# Altium PCB PCB1.PcbDoc (part 2 of 3)
Units mil, origin at the board's own origin, x right, y up, seen from the top; angles counter-clockwise.
Board outline 8343 x 1831 mil, 4 copper layers (Top Layer, VCC, GND, Bottom Layer); 375 components, 241 nets, 1575 pads, 601 vias.
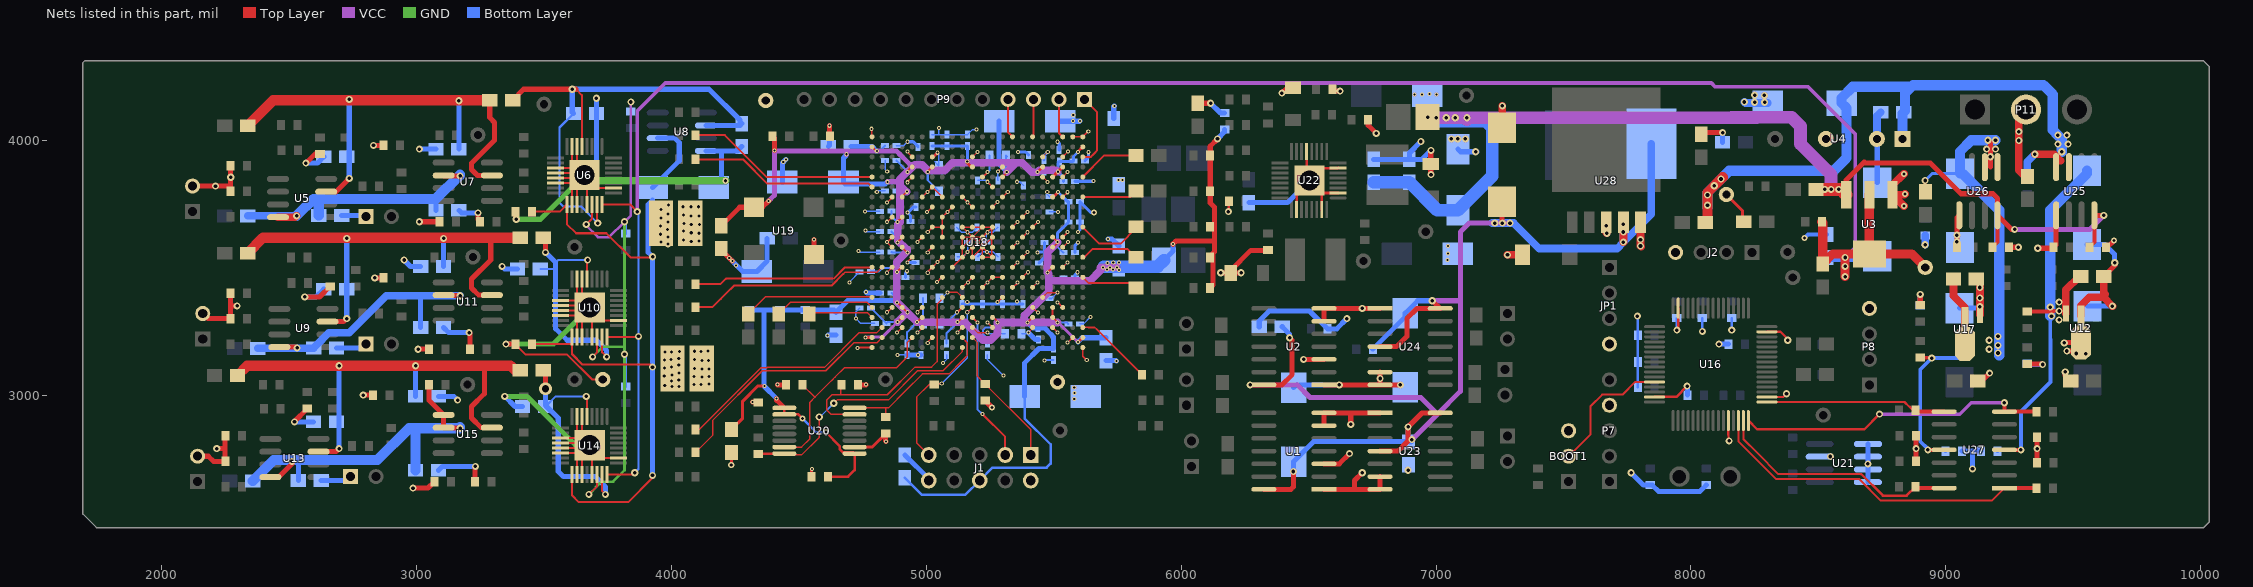
[diagram p4: the nets of this part, all layers, seen from the top]

## Via types
v1: diameter 28, hole 14, Top Layer to Bottom Layer, 286 vias
v2: diameter 16, hole 8, Top Layer to Bottom Layer, 238 vias
v3: diameter 24, hole 12, Top Layer to Bottom Layer, 70 vias
v4: diameter 196.85, hole 118.11, Top Layer to Bottom Layer, 6 vias
v5: diameter 50, hole 28, Top Layer to Bottom Layer, 1 vias

## Nets (pads, with @x,y where several pads share a name; then routed paths per layer and width w, separated by ;. In a path a pad name is that pad's centre, name@x,y a point inside that pad or via, vN(x,y) a via of type N, cw(c..) or ccw(c..) an arc to the next point about the centre after c; other vN are vias at no path point) (continued)
+3.3V: C39.2 C40.2 C54.2 C55.2 C56.2 C57.2 C60.2 C61.2 C62.2 C63.2 C64.2 C65.2 C66.2 C67.2 C68.2 C69.2 C70.2 C71.2 C72.2 C73.2 C74.2 C118.1 C119.1 C120.2 C121.2 C122.2 C123.2 C124.2 C125.2 C126.2 C127.2 C128.2 C129.2 C130.2 C131.2 C132.2 C133.2 C134.2 C135.1 J1.6 J5.2 R81.1 R82.1 R83.2 R84.2 R88.2 R129.2 R130.2 R131.2 R132.2 R133.2 R134.2 R135.2 R136.2 U18.A2 U18.A21 U18.AB2 U18.AB21 U18.D4 U18.D5 U18.D9 U18.D11 U18.D12 U18.D14 U18.D16 U18.E19 U18.F4 U18.G19 U18.K4 U18.L19 U18.N4 U18.P18 U18.U4 U18.V19 U18.W4 U18.W5 U18.W9 U18.W11 U18.W12 U18.W16 U18.W18 U18.Y19 U19.4 U20.1 U20.2 U20.9 | length 12538.7
  Top Layer w8: U18.A21@4786.61,3974.02 4803.63,3957 v2(4805,3957) ; v2(4884,3483) 4902.57,3501.57 U18.D9@4904.72,3501.57 ; v2(4885,3364) 4885,3363 4886,3362 4886.82,3362 U18.D5@4904.72,3344.09 4923.82,3325 v2(4925,3325) ; v2(4886,3287) 4887,3287 U18.D4@4904.72,3304.72 ; v2(4886,3599) 4904.72,3617.72 U18.D12@4904.72,3619.69 ; v2(4886,3679) 4886,3679.7 U18.D14@4904.72,3698.43 ; U18.D11@4904.72,3580.32 4904.72,3578.28 4925,3558 v2(4925,3559) ; U18.D16@4904.72,3777.17 4904.72,3779.72 v2(4923,3798) ; v2(4926,3876) 4926,3877 4924,3879 4940.28,3895.28 U18.E19@4944.09,3895.28 ; v2(4963,3286) 4981.72,3304.72 U18.F4@4983.46,3304.72 ; v2(5005,3875) 5005,3877.44 U18.G19@5022.83,3895.28 ; v2(5122,3286) 5122.22,3286 U18.K4@5140.94,3304.72 ; U18.N4@5259.06,3304.72 5261.28,3304.72 5279,3287 v2(5279,3285) ; U18.P18@5298.43,3855.91 5315,3872.48 v2(5315,3875) ; v2(5397,3285) 5397,3285.19 U18.U4@5416.54,3304.72 ; v2(5475,3481) 5475,3481.3 U18.W9@5495.28,3501.57 ; U18.W5@5495.28,3344.09 U18.W4@5495.28,3304.72 5515,3285 v2(5515,3284) ; U18.W11@5495.28,3580.32 5497.32,3580.32 5515,3598 v2(5515,3600) ; U18.W12@5495.28,3619.69 v2(5515,3600)
  Top Layer w10: U20.1@4442.2,2949.57 U20.2@4442.2,2923.98 4497.02,2923.98 v3(4513,2908) ; v3(4605,2854) 4659.55,2799.45 4659.55,2787.8 4671.18,2776.17 4712.06,2776.17 U20.9@4717.8,2770.43 4717.8,2705.8 4692,2680 C40.2@4613.46,2680
  Top Layer w12: C126.2@4235.06,2864.92 4278.81,2908.68 4278.81,2976.19 4338.63,3036 v2(4364,3036) ; v2(4761,3226) U18.A2@4786.61,3225.98 ; v2(5160,3916) 5160,3911 5175.72,3895.28 U18.L19@5180.31,3895.28 ; v2(5436,3875) 5436,3875.37 U18.V19@5455.91,3895.28 ; U18.W16@5495.28,3780.72 U18.W16@5495.28,3777.17 5497.17,3777.17 5516,3796 v2(5516,3797) ; U18.W18@5495.28,3855.91 v2(5515.69,3876.32) U18.Y19@5534.65,3895.28 ; v2(5594,3208) 5595.4,3208 U18.AB2@5613.39,3225.98 ; v2(5595,3954) 5595,3955.63 U18.AB21@5613.39,3974.02
  Top Layer w20: C54.2@4195.06,3664.92 4267.03,3736.9 U19.4@4322.37,3736.9 4355.9,3736.9 v2(4381,3762) ; R136.2@4396.54,4015 4403,4008.54 v2(4403,3959) ; v2(4412,2986) 4412,2979.77 U20.1@4442.2,2949.57 ; v2(5968,3592) 5968,3594 5979,3605 6130,3605 ; R88.2@6113.46,3420 6125,3431.54 6125,3557.43 6130,3562.43 6130,3575 6130,3591 6130,3605 ; v1(6142,4005) 6113.46,3976.46 R135.2@6113.46,3940 6113.46,3753.96 6130,3737.43 6130,3605
  VCC w8: v2(4805,3957) 4848,3957 4883,3957
  VCC w12: v2(4761,3226) 4762,3227 4826,3227 v2(4886,3287) ; v2(5515,3284) 5518,3284 v2(5594,3208)
  VCC w20: v2(4381,3762) 4403,3784 v2(4403,3959) 4405,3957 v2(4805,3957) 4883,3957 4895,3945 4936,3904 4953.99,3904 ; v2(4686,3945) 4686,3957 ; v2(4847,3837) 4881.99,3837 4896,3822.99
  VCC w30: v2(4886,3287) 4887,3287 v2(4925,3325) ; v2(4923,3798) 4920.99,3798 4896,3822.99 ; v2@5005,3881 v2@5006,3881 ; v2(5315,3875) 5352,3912 ; v2(5436,3875) 5413,3875 5376,3912 5352,3912 ; v2@5436.38,3875.38 5443,3882 5510,3882 v2(5515.69,3876.32) ; v2(5515,3284) 5514,3285 v2(5397,3285) 5384,3285 ; v2(5515,3600) 5475,3560 v2(5475,3481) 5480,3476 5480,3448 ; v2(5747,3501) 5732,3501 v2(5720,3501) v2(5693,3501) 5685,3501 5683,3499 5683,3490 5642,3449 5481,3449 5480,3448 ; 4896,3822.99 4896,3847.01 4924.99,3876 v2(4926,3876) 4953.99,3904 4983,3904 v2@5006,3881 ; 4896,3822.99 4896,3678 4888,3670 4888,3606 4922,3572 4925,3572 4925,3564 4884,3523 v2(4884,3483) 4884,3366 v2(4925,3325) ; v2(4925,3325) 4925,3323.99 v2(4963,3286) v2(5122,3286) 5151.1,3286 5221.1,3216 5252.01,3216 5279,3242.99 v2(5279,3285) 5384,3285 ; v2@5006,3881 5022,3881 5071,3881 5098,3908 5098,3908.23 5101.77,3912 5352,3912 ; 5384,3285 5384,3312.01 5424.99,3353 5427.08,3353 5480,3405.92 5480,3448
  Bottom Layer w8: C67.2@4782.83,3341.39 C56.2@4842.83,3281.39 4848.44,3287 v2(4886,3287) ; C121.2@4782.83,3484.12 4813.12,3484.12 4827,3498 4869,3498 v2(4884,3483) ; v2(4805,3957) 4815.56,3957 C68.2@4837.17,3978.61 ; C57.2@4862.83,3401.39 4885,3379.23 v2(4885,3364) ; C60.2@4862.83,3561.39 4865.23,3559 v2(4925,3559) ; C62.2@4862.83,3641.39 4886,3618.23 v2(4886,3599) ; C63.2@4862.83,3721.39 4862.83,3702.17 v2(4886,3679) ; C64.2@4882.83,3801.39 4886.23,3798 v2(4923,3798) ; C61.2@4882.83,3921.39 4882.83,3919.17 v2(4926,3876) ; C70.2@4923.86,3202.83 4923.86,3246.86 v2(4963,3286) 4952,3297 4952,3298 ; v2(4925,3325) 4952,3298 ; R84.2@4986.54,3380 R83.2@4986.54,3280 4970,3280 4952,3298 ; v2(5005,3875) 5005,3843.5 R81.1@5048.5,3800 ; C132.2@5078.61,3202.83 5078.61,3242.61 v2(5122,3286) ; C130.2@5238.61,3202.83 5238.61,3220.94 5222,3237.54 5222,3253 5221,3254 5233,3266 5260,3266 v2(5279,3285) ; R82.1@5315,3936.5 R82.1@5311.5,3940 5311.5,3878.5 v2(5315,3875) 5318.44,3878.44 5318.44,3917.79 ; v2(5397,3285) 5416.44,3285 C131.2@5438.61,3262.83 5464.17,3262.83 5498.61,3228.39 C69.2@5498.61,3182.83 ; v2(5475,3481) 5497.39,3458.61 C129.2@5537.17,3458.61 ; v2(5515,3284) 5551.77,3284 C120.2@5557.17,3278.61 ; v2(5515,3600) 5515,3580.77 C127.2@5537.17,3558.61
  Bottom Layer w10: v3(4513,2908) 4567,2854 v3(4605,2854) ; C128.2@4915.06,2675.08 4982.14,2608 5152,2608 J1.6@5209,2665 5259,2715 5471,2715 5487,2731 5487,2807 5385.43,2908.57 C119.1@5385.43,2994.64
  Bottom Layer w12: C133.2@5021.39,3977.17 C66.2@5161.39,3977.17 5161.39,3917.39 v2(5160,3916) ; v2(5436,3875) 5459.23,3875 C72.2@5461.39,3877.17 ; v2(5515,3600) 5515,3636.44 C65.2@5557.17,3678.61 C55.2@5557.17,3758.61 5554.39,3758.61 v2(5516,3797) ; C73.2@5537.17,3838.61 5537.17,3854.83 v2(5515.69,3876.32) 5515.69,3911.46 C74.2@5521.39,3917.17 5575.73,3917.17 C134.2@5577.17,3918.61 5577.17,3936.17 v2(5595,3954)
  Bottom Layer w20: R131.2@4305,3333.46 4362,3333.46 ; v2(4412,2986) 4362,3036 4362,3333.46 ; v2(4686,3945) 4684,3943 4684,3940 4674.57,3930.57 C118.1@4674.57,3835.36 4680.94,3829 4839,3829 v2(4847,3837) ; C125.2@4704.92,3975.06 4786.94,3975.06 v2(4805,3957) ; v2(4925,3325) 4920,3325 4874,3371 4691.02,3371 C122.2@4644.94,3324.92 4636.4,3333.46 R129.2@4525,3333.46 R130.2@4425,3333.46 4362,3333.46 ; C135.1@5285.43,4074.64 5285.43,3906.52 5315,3876.94 v2(5315,3875) ; C119.1@5385.43,2994.64 5385.43,3126.43 5441.83,3182.83 C69.2@5498.61,3182.83 5498.61,3227.45 5490,3236.06 5490,3237 5464.17,3262.83 5419.17,3262.83 v2(5397,3285) ; v2(5594,3208) 5610.92,3224.92 C124.2@5704.94,3224.92 ; J5.2@5931.71,3529.23 5968,3565.52 v2(5968,3592) ; v1(6142,4005) 6170,4033 C39.2@6170,4041.54
  Bottom Layer w50: v2@5697,3504 5732,3504 5906.48,3504 J5.2@5931.71,3529.23
  other v2: 5756,3490 5708,3492 5732,3492 5710,3519 5733,3520 5755,3520
+3.3V_AD: C6.1 C7.1 R6.2 R127.2 T9.1 U3.2 U3.4 U6.24 U10.24 U14.24 | length 8579.8
  Top Layer w8: U6.24@3726.72,3747.81 3837.19,3747.81 v1(3865,3720) ; U14.24@3746.72,2687.81 3847.81,2687.81 v1(3855,2695) ; U10.24@3746.72,3227.81 3867.81,3227.81 v1(3870,3230)
  Top Layer w36: R127.2@8513.46,3680 8516.98,3676.48 R6.2@8516.98,3513.92 8556.91,3553.86 U3.4@8700,3553.86 ; v1(8605,3465) 8605,3553.86 v1(8605,3539.92) ; U3.2@8700,3786.14 U3.4@8700,3553.86 ; T9.1@8919.48,3501.03 8866.65,3553.86 U3.4@8700,3553.86
  VCC w15: v1(3865,3720) 3865,4115 3975.03,4225.03 5154.97,4225.03 ; 5155,4225 5161.32,4225 ; 5161.35,4225.03 5835,4225.03 ; 5944.97,4225.03 5835,4225.03 ; v1@8605,3455 v1(8605,3539.92) 8645,3579.92 8645,4025 8460,4210 8095,4210 8079.97,4225.03 5835,4225.03
  Bottom Layer w8: v1(3855,2695) 3870,2710 3870,2740 ; v1(3865,3720) 3870,3715 v1(3870,3230) 3870,2740 ; 3870,2720 3870,2740
  Bottom Layer w36: C7.1@8534.94,3539.92 8726.92,3539.92 C6.1@8731,3544
  other v1: 8605,3505
+5V1: C13.2 C92.1 R60.1 R61.2 U5.7 U7.3 | length 2009.7
  Top Layer w20: U5.7@2644.49,3798 2683,3798 v1(2735,3850) ; R61.2@3286.08,4156.98 3286.08,4088.92 3305,4070 3305,4000 3215,3910 3215,3885 3238,3862 U7.3@3294.49,3862
  Top Layer w40: R60.1@2336.08,4056.98 2436.08,4156.98 R61.2@3286.08,4156.98
  Bottom Layer w20: v1(2735,3850) v1(2735,4160) ; v1(3165,4155) 3165.08,4154.92 C92.1@3165.08,3964.94
+5V2: C22.2 C158.1 R62.1 R63.2 U9.7 U11.3 | length 1919.6
  Top Layer w20: U9.7@2649.49,3288 2713,3288 v1(2725,3300) ; 3290,3616.98 3290,3530 3215,3455 3215,3420 3243,3392 U11.3@3294.49,3392
  Top Layer w40: R62.1@2336.08,3556.98 2396.08,3616.98 3290,3616.98 R63.2@3406.08,3616.98
  Bottom Layer w20: v1(2725,3300) v1(2725,3615) ; v1(3105,3615) 3105.08,3614.92 C158.1@3105.08,3504.94
+5V3: C31.2 C160.1 R64.1 R65.2 U13.7 U15.3 | length 1994.4
  Top Layer w20: U13.7@2614.49,2778 2683,2778 v1(2695,2790) ; 3265,3115 3265,3005 3215,2955 3215,2910 3253,2872 U15.3@3294.49,2872
  Top Layer w40: R64.1@2296.08,3076.98 2334.1,3115 3265,3115 3368.06,3115 3388.06,3095 R65.2@3415,3095
  Bottom Layer w20: v1(2695,2790) v1(2695,3115) ; C160.1@2994.92,2995.06 2994.92,3114.92 v1(2995,3115)
+5V_485: C1.2 C2.2 C3.1 C4.1 C155.1 L3.2 R124.1 U1.14 U2.14 U23.4 U23.14 U24.4 U24.14 U28.4 | length 5599.2
  Top Layer w20: v1(6270,3040) U2.14@6323.78,3040 6395,3040 6435,3080 6435,3215 v1(6425,3225) ; v1(6440,2700) 6440,2640 ; U23.4@6780,2780 6850,2780 6890,2820 v1(6890,2875) 6945,2930 U23.14@7016.22,2930 ; U24.4@6780,3190 6845,3190 6885,3230 6885,3300 6925,3340 U24.14@7015,3340 ; v1(6985,3370) U24.14@7015,3340 ; U24.14@7016.22,3340 U24.14@7015,3340 ; C155.1@7214,3759 C155.1@7259,3759 7259,3676 v1(7260,3675) ; 6430,2630 6440,2640 ; 6430,2630 U1.14@6323.78,2630 6430,2630 ; 6430,2630 6440,2640
  Top Layer w30: v1(7735,3600) 7735.07,3600.07 U28.4@7735.07,3679
  VCC w20: v1(6270,3040) 6455,3040 6505,2990 6940,2990 7005,2925 ; v1(6905,2825) 7005,2925 ; v1(6985,3370) 7095,3370 ; v1(7290,3675) v1(7260,3675) v1(7230,3675) 7130,3675 7095,3640 7095,3370 ; 7005,2925 7095,3015 7095,3370
  Bottom Layer w20: C2.2@6396,3268.08 6425,3239.08 v1(6425,3225) ; v1(6440,2700) 6440,2738 C3.1@6441,2739 6519.92,2817.92 C1.2@6890,2817.92 ; R124.1@6751.5,3180 6879,3307.5 C4.1@6879,3321 6928,3370 v1(6985,3370) ; v1(6890,2875) C1.2@6890,2817.92 ; v1(6905,2825) 6910,2825 6901,2816 C1.2@6891.92,2816 C1.2@6890,2817.92
  Bottom Layer w30: v1@7220,3675 v1(7230,3675) v1(7260,3675) v1(7290,3675) 7305,3675 7405,3575 7710,3575 v1(7735,3600) ; v1(7735,3670) v1(7735,3640) v1(7735,3600) ; L3.2@7844.74,3986 7844.74,3709.74 v1(7735,3600)
+5V_D: C91.1 C93.2 C94.2 C148.1 C150.1 J4.1 R5.1 U3.3 U25.8 U26.8 | length 4620
  Top Layer w15: C148.1@9183.5,3580 9203,3599.5 U26.8@9203,3705.51 ; C150.1@9563.5,3580 9583,3599.5 U25.8@9583,3705.51
  Top Layer w20: U3.3@8609.45,3786.14 8609.45,3844.45 8680,3915 8685,3910 8940,3910 9060,3790 9185,3790 9203,3772 U26.8@9203,3705.51 9258.51,3650 v1(9270,3650) ; U25.8@9583,3705.51 9583.51,3705 v1(9620,3705)
  Top Layer w50: R5.1@8491.08,3806.98 v1(8525,3806.98) v1(8550,3806.98) v1(8580,3806.98) 8588.61,3806.98 U3.3@8609.45,3786.14
  VCC w20: v1(9270,3650) 9565,3650 v1(9620,3705)
  VCC w50: v1@6960,4085 6963,4088 v1(7121,4088) ; v1@7120,4080 7120,4087 v1(7121,4088) ; 8160,4090 8260,4090 ; v1(8550,3806.98) 8550,3865 8430,3985 8430,4055 8395,4090 8260,4090 ; v1(7121,4088) 7195,4088 8258,4088 8260,4090
  Bottom Layer w50: C93.2@6755.06,3835.08 C94.2@6895.06,3835.08 7004.71,3725.43 C91.1@7085.36,3725.43 7220,3860.06 7220,4050 7195,4075 6982.44,4075 v1(6966.67,4090.77)
  other v1: 7000,4088 7040,4088 7075,4088
+5VA: C9.2 C15.1 R61.1 U6.5 U6.23 U8.2 | length 2100.2
  Top Layer w8: 3625,4200 3647.98,4177.02 U6.5@3647.98,3975.76 ; U6.23@3707.03,3747.81 3707.03,3677.97 v1(3710,3675)
  Top Layer w20: R61.1@3376.08,4156.98 3419.1,4200 v1(3610,4200) 3625,4200
  Bottom Layer w8: C9.2@3615.08,4104.94 3560,4049.86 3560,3755 3575,3740 3645,3740 v1(3710,3675)
  Bottom Layer w20: C9.2@3615.08,4104.94 3610,4110.02 v1(3610,4200) 4147,4200 4267.98,4079.02 C15.1@4267.98,4058 ; U8.2@4134.49,4058 C15.1@4267.98,4058 ; C15.1@4275.06,4065.08 C15.1@4267.98,4058
+5VB: C18.2 R63.1 U10.5 U10.23 | length 997.2
  Top Layer w8: U10.5@3667.98,3455.76 3667.98,3527.98 v1(3670,3530) ; U10.23@3727.03,3227.81 3727.03,3167.97 v1(3745,3150)
  Top Layer w20: R63.1@3496.08,3616.98 3505,3608.06 v1(3505,3560)
  Bottom Layer w8: C18.2@3484.92,3495.06 3484.98,3495 3545,3495 ; 3545,3520 3555,3530 v1(3670,3530) v1@3680.14,3530
  Bottom Layer w20: v1(3505,3560) 3545,3520 3545,3495 3545,3260 3590,3215 3705,3215 3745,3175 v1(3745,3150)
+5VC: C27.2 R65.1 U14.5 U14.23 | length 1096.5
  Top Layer w8: v1(3665,2995) 3667.98,2992.02 U14.5@3667.98,2915.76 ; U14.23@3727.03,2687.81 3727.03,2622.97 v1(3740,2610)
  Top Layer w20: R65.1@3496.08,3096.98 3505,3088.06 v5(3505,3025)
  Bottom Layer w8: C27.2@3504.92,2955.06 3544.86,2995 v1(3665,2995)
  Bottom Layer w20: v5(3505,3025) 3505,2960 3507.43,2957.57 3555.08,2909.92 3555.08,2699.92 3575,2680 ; 3670,2680 3575,2680 ; v1(3740,2610) 3740,2640 3700,2680 3575,2680
+12V: C8.1 C33.1 C38.1 C45.1 C153.2 R8.2 R110.2 R128.1 U4.1 U12.3 U25.3 U25.4 U27.4 | length 4293.5
  Top Layer w15: U27.4@9230,2785 v1(9295,2785) ; R110.2@9320,3328.46 9423.46,3328.46 9425,3330
  Top Layer w30: v1(9350,3945) 9425,3945 9450,3920 ; U12.3@9470.94,3319.8 9470.94,3412.45 9523.43,3464.94 C33.1@9529.92,3464.94
  Top Layer w40: R128.1@8056.08,3676.98 8065,3685.9 v1(8065,3745) v1(8065,3785) 8065,3795 v1@8125,3855
  Bottom Layer w15: C153.2@9203.46,2780 9208.46,2785 v1(9295,2785) 9295,2935 9411.5,3051.5 9411.5,3218.5 9410,3220 9410,3305 v1(9415,3310)
  Bottom Layer w30: R8.2@9320,3853.46 9320,3915 v1(9350,3945)
  Bottom Layer w40: v1@8065,3735 v1(8065,3745) v1(8065,3785) 8065,3795 8150,3880 8560,3880 8610,3930 8610,4127 C8.1@8591,4146 8591,4166 8635,4210 8865,4210 ; U4.1@8830,4005 8830,4104.87 8840,4114.87 8840,4185 8865,4210 ; v1@9410,3310 v1(9410,3345) 9410,3725 9554,3869 C45.1@9554,3881 ; v1(9455,3955) 9455,4005 v1(9440,4020) 9420,4040 9420,4180 9384,4216 8871,4216 8865,4210
  other v1: 9445,3295 9445,3330 9445,3365 8091.21,3821.21 8117.8,3847.8 9440,3985 9480,3985 9475,4020
+VREFA: C17.1 C26.1 C35.1 U6.17 U8.6 U10.17 U14.17 | length 3048.3
  Top Layer w8: C35.1@3451.5,3200 U10.17@3608.92,3200 ; C26.1@3451.5,3720 3561.11,3720 U6.17@3588.92,3747.81 3588.92,3671.08 3625,3635 3744,3635 3839,3540 3922.43,3540 v1(3925.43,3543) ; U14.17@3608.92,2687.81 3608.92,2606.08 3635,2580 3830,2580 3925,2675 v1(3925,2685) ; U10.17@3608.92,3227.81 U10.17@3608.92,3200 ; v1(3925,3110) 3915,3120 3650,3120 3608.92,3161.08 U10.17@3608.92,3200
  Bottom Layer w20: v1@3925,2680 3925.43,2680.43 3925.43,2740.43 ; 3925,2740 3925.43,2740.43 ; 3925.43,3765.43 3908,3748 3908,3700 3908,3663 3908,3560.43 v1(3925.43,3543) 3925.43,2740.43 ; C17.1@3925.43,3814.64 4030,3919.21 4030,3990 4012,4008 U8.6@3945.51,4008
-5V1: C14.2 C157.2 R69.1 U5.4 U7.6 | length 1167.9
  Top Layer w20: U7.6@3105.51,3862 3107.51,3860 v1(3170,3860)
  Top Layer w30: U5.4@2455.51,3698 2523,3698 v1(2528.02,3703.02)
  Bottom Layer w20: 2480,3703.02 2484.92,3707.94 ; 3075,3770 3075.08,3769.92 C157.2@3075.08,3724.94
  Bottom Layer w30: R69.1@2336.08,3703.02 2480,3703.02 v1(2528.02,3703.02) v1@2530,3705
  Bottom Layer w40: v1(2528.02,3703.02) 2595,3770 2620,3770 ; C14.2@2615.08,3704.94 2615.08,3765.08 2620,3770 ; v1(3170,3860) 3170,3865 3075,3770 2620,3770
-5V2: C23.2 C159.2 R71.1 U9.4 U11.6 | length 1143.1
  Top Layer w20: U9.4@2460.51,3188 2527,3188 v1(2530,3185) ; U11.6@3105.51,3392 3107.51,3390 v1(3170,3390)
  Bottom Layer w20: 3010,3390 3015.08,3384.92 C159.2@3015.08,3264.94
  Bottom Layer w30: R71.1@2376.08,3183.02 2593.16,3183.02 C23.2@2595.08,3184.94 2630.08,3219.94 2630.08,3220.3 2654.78,3245 2735,3245 2880,3390 3010,3390 v1(3170,3390)
-5V3: C32.2 C161.2 R58.1 R72.1 U13.4 U15.5 U15.6 | length 1536
  Top Layer w20: U13.4@2425.51,2678 2458,2678 2510,2730 v1(2510,2740) ; R58.1@3048.5,3040 3048.5,2979.01 U15.5@3105.51,2922 U15.6@3105.51,2872 3107.51,2870 v1(3170,2870)
  Bottom Layer w20: C32.2@2535.08,2664.94 2535.08,2740.08 2540,2745
  Bottom Layer w40: R72.1@2356.08,2663.02 2438.06,2745 2540,2745 2845,2745 2970,2870 3005,2870 ; C161.2@2995.08,2704.94 2995.08,2860.08 3005,2870 ; 3005,2870 v1@3165,2870 ; v1@3165,2870 v1(3170,2870) 3170,2875 v1@3165,2870
-12V: C36.2 C46.2 C154.1 D5.2 R113.2 U17.2 U26.1 U26.2 U27.11 | length 2434.6
  Top Layer w12: v1(8919,3842) 8919,3799.44 D5.2@8920.36,3798.08
  Top Layer w15: R113.2@8900,3146.54 8943.46,3146.54 v1(8945,3145) ; v1(8930,2785) U27.11@8993.78,2785
  Top Layer w20: v1(9165,4000) 9175,3990 9175,3895
  Top Layer w30: C36.2@9030.08,3455.06 9030.08,3389.92 9075,3345 U17.2@9075,3306.93 ; U17.2@9075,3306.93 U17.2@9075,3200.63 U17.2@9075,3306.93
  Bottom Layer w12: v1(8919,3842) 8946,3869 C46.2@9056,3869
  Bottom Layer w15: C154.1@8998.5,2780 8993.5,2785 v1(8930,2785) 8930,2788.01 8900,2818.01 8900,3100 v1(8945,3145) 9050,3145 9085,3180
  Bottom Layer w40: v1(9195,4000) v1(9165,4000) 9100,4000 9056,3956 C46.2@9056,3869 9066,3869 9210,3725 v1@9210,3155
  other v1: 9205,3165 9170,3180 9205,3195 9170,3215 9205,3230 9175,3935 9160,3965 9195,3965
ADC_IN0: R116.2 U16.14 U27.1 | length 1368.4
  Top Layer w8: U16.14@8185.91,2900 8185.91,2819.09 8335,2670 8661.41,2670 8745.41,2586 9181,2586 U27.1@9230,2635
  Top Layer w15: U27.1@9230,2635 R116.2@9356.54,2635
ADC_IN1: R117.1 U16.15 U27.14 | length 1049.1
  Top Layer w8: U16.15@8205.59,2900 8205.59,2827.69 8262.32,2770.96 ; 8205.91,2827.38 8262.32,2770.96 ; 8668.28,2690 8343.28,2690 8262.32,2770.96
  Top Layer w10: 8668.28,2690 8753.28,2605 8846.5,2605 R117.1@8881.5,2640
  Top Layer w15: R117.1@8881.5,2640 8886.5,2635 U27.14@8993.78,2635
ADC_IN2: R120.2 U16.16 U27.7 | length 1225.5
  Top Layer w8: U16.16@8225.28,2900 U16.16@8226.5,2900
  Top Layer w10: U16.16@8225.28,2900 8260.28,2865 8680,2865 v1(8740,2925)
  Top Layer w15: v1(9230,2970) U27.7@9230,2935 R120.2@9356.54,2935
  VCC w15: v1(8740,2925) 9055,2925 9100,2970 v1(9230,2970)
ADC_IN3: R121.1 U16.17 U27.8 | length 850.5
  Top Layer w8: U16.17@8298.11,2972.61 8341.79,2972.61 8342.07,2972.9 ; U16.17@8298.11,2972.84 8298.17,2972.9 8342.07,2972.9 ; 8605,2972.9 8700,2972.9 ; 8858.7,2953.7 8857.28,2953.7 8838.08,2972.9 8700,2972.9 ; 8342.07,2972.9 8700,2972.9
  Top Layer w10: 8858.7,2953.7 8872.4,2940 R121.1@8881.5,2940
  Top Layer w15: R121.1@8881.5,2940 8886.5,2935 U27.8@8993.78,2935
AGND: C9.1 C11.2 C13.1 C14.1 C15.2 C17.2 C18.1 C20.2 C22.1 C23.1 C26.2 C27.1 C29.2 C31.1 C32.1 C35.2 C92.2 C157.1 C158.2 C159.1 C160.2 C161.1 P22.1 P24.1 P26.1 R7.1 R12.1 R13.1 R15.1 R19.2 R20.1 R25.1 R29.1 R30.1 R32.1 R36.2 R37.1 R42.1 R46.1 R47.1 R49.1 R53.2 R54.1 R59.1 R68.1 S1.2 S2.2 S3.2 T7.1 U6.6 U6.7 U6.11 U6.12 U6.13 U6.14 U6.18 U6.19 U6.21 U6.22 U6.26 U6.33 U8.4 U10.6 U10.7 U10.11 U10.12 U10.13 U10.14 U10.18 U10.19 U10.21 U10.22 U10.26 U10.33 U14.6 U14.7 U14.11 U14.12 U14.13 U14.14 U14.18 U14.19 U14.21 U14.22 U14.26 U14.33 | length 11781.7
  Top Layer w8: C35.2@3386.54,3200 3427.54,3159 3590,3159 3687.97,3061.03 T7.1@3729.48,3061.03 ; U6.14@3543.65,3832.26 3627.75,3832.26 U6.33@3628.29,3832.8 ; U6.13@3543.65,3851.94 3647.43,3851.94 U6.33@3658.72,3863.23 ; U6.12@3543.65,3871.63 U6.33@3650.31,3871.63 ; U6.11@3543.65,3891.31 3630.63,3891.31 U6.33@3658.72,3863.23 ; U14.14@3563.65,2772.26 3647.75,2772.26 U14.33@3648.29,2772.8 ; U14.13@3563.65,2791.94 3667.43,2791.94 U14.33@3678.72,2803.23 ; U14.12@3563.65,2811.63 U14.33@3670.31,2811.63 ; U14.11@3563.65,2831.31 U14.33@3650.63,2831.31 ; U10.14@3563.65,3312.26 3647.75,3312.26 U10.33@3648.29,3312.8 ; U10.13@3563.65,3331.94 3667.43,3331.94 U10.33@3678.72,3343.23 ; U10.12@3563.65,3351.63 U10.33@3670.31,3351.63 ; U10.11@3563.65,3371.31 U10.33@3650.63,3371.31 ; U6.18@3608.61,3747.81 3608.61,3813.12 U6.33@3628.29,3832.8 ; U6.7@3608.61,3975.76 3608.61,3913.34 U6.33@3628.29,3893.65 ; U6.19@3628.29,3747.81 U6.33@3628.29,3832.8 ; U6.6@3628.29,3975.76 U6.33@3628.29,3893.65 ; U14.18@3628.61,2687.81 3628.61,2753.12 U14.33@3648.29,2772.8 ; U14.7@3628.61,2915.76 3628.61,2853.34 U14.33@3648.29,2833.65 ; U10.18@3628.61,3227.81 3628.61,3293.12 U10.33@3648.29,3312.8 ; U10.7@3628.61,3455.76 3628.61,3393.34 U10.33@3648.29,3373.65 ; U14.19@3648.29,2687.81 U14.33@3648.29,2772.8 ; U14.6@3648.29,2915.76 U14.33@3648.29,2833.65 ; U10.19@3648.29,3227.81 U10.33@3648.29,3312.8 ; U10.6@3648.29,3455.76 U10.33@3648.29,3373.65 ; v1(3665,3670) 3687.35,3692.35 U6.22@3687.35,3747.81 ; U6.21@3667.66,3747.81 3667.66,3854.28 U6.33@3658.72,3863.23 ; v1(3675,2610) 3707.35,2642.35 U14.22@3707.35,2687.81 ; U14.21@3687.66,2687.81 3687.49,2687.98 3687.49,2794.46 U14.33@3678.72,2803.23 ; U10.21@3687.66,3227.81 3687.66,3334.28 U10.33@3678.72,3343.23 ; v1(3690,3150) 3707.35,3167.35 U10.22@3707.35,3227.81 ; U6.26@3771.99,3812.57 3709.37,3812.57 U6.33@3658.72,3863.23 ; U14.26@3791.99,2752.57 3729.37,2752.57 U14.33@3678.72,2803.23 ; U10.26@3791.99,3292.57 3729.37,3292.57 U10.33@3678.72,3343.23 ; U6.33@3628.29,3832.8 U6.33@3658.72,3863.23 ; U6.33@3628.29,3893.65 U6.33@3650.31,3871.63 ; U14.33@3648.29,2772.8 U14.33@3678.72,2803.23 ; U14.33@3648.29,2833.65 U14.33@3650.63,2831.31 ; U10.33@3648.29,3312.8 U10.33@3678.72,3343.23 ; U10.33@3648.29,3373.65 U10.33@3650.63,3371.31 ; U6.33@3650.31,3871.63 U6.33@3658.72,3863.23 ; U14.33@3650.63,2831.31 U14.33@3670.31,2811.63 ; U10.33@3650.63,3371.31 U10.33@3670.31,3351.63 ; U14.33@3670.31,2811.63 U14.33@3678.72,2803.23 ; U10.33@3670.31,3351.63 U10.33@3678.72,3343.23
  Top Layer w20: S1.2@2120,3820 2268.5,3820 ; S3.2@2140,2760 2182,2760 2202,2740 R54.1@2248,2740 ; S2.2@2160,3320 2180,3300 R37.1@2268.5,3300 2268.5,3350 ; v1(2215,2790) 2248,2790 ; R47.1@2248.5,2840 2248.5,2837 2248,2837 2248,2790 ; R30.1@2268.5,3400 2268.5,3350 ; R20.1@2268.5,3800 2268.5,3820 ; R13.1@2268.5,3900 2268.5,3820 ; v1(2295,3350) 2268.5,3350 ; v1(2520,2895) 2520,2896.54 C29.2@2570,2946.54 ; v1(2560,3385) 2618.46,3385 C20.2@2660,3426.54 ; v1(2565,3910) 2601.54,3946.54 C11.2@2620,3946.54 ; v1(2790,3000) R59.1@2828.5,3000 ; v1(2830,3980) R25.1@2868.5,3980 ; v1(2835,3460) R42.1@2868.5,3460 ; v1(2985,2635) 3043.5,2635 R46.1@3068.5,2660 ; v1(3005,3180) R29.1@3048.5,3180 ; v1(3010,3680) R12.1@3088.5,3680 ; v1(3205,3245) 3208.5,3241.5 R32.1@3208.5,3180 ; R49.1@3228.5,2660 3228.5,2718.5 v1(3230,2720) ; v1(3240,3715) 3240,3688.5 R15.1@3248.5,3680 ; v1(3350,3200) C35.2@3386.54,3200 ; C26.2@3386.54,3720 3386.54,3693.46 v1(3390,3690) ; R54.1@2248,2740 R54.1@2248.5,2740 R54.1@2248,2740 ; R54.1@2248,2740 2248,2790
  VCC w8: v1(3815,3680) 3840,3705 v1(3840,4150)
  VCC w10: v1(3665,3670) 3665,3666 3711,3620 3741,3620 3755,3620 v1(3815,3680) 3840,3705 v1(3840,4150)
  GND w10: v1(3665,3670) v1@3665,3671.01 ; v1(3675,2610) 3725,2660 3770,2660 3815,2705 v1(3815,3160) 3815,3190 ; v1(3690,3150) 3730,3190 3815,3190 ; v1(3815,3680) 3815,3190
  GND w20: v1(3345,2995) 3432,2995 3623.77,2803.23 U14.33@3678.72,2803.23 ; v1(3350,3200) 3535.49,3200 U10.33@3678.72,3343.23 ; v1(3390,3690) 3485.49,3690 U6.33@3658.72,3863.23 ; v3@4210,3839 v3(4212,3841)
  GND w30: U6.33@3658.72,3863.23 3680.94,3841 v3(4212,3841)
  Bottom Layer w8: R19.2@3840,4113.46 v1(3840,4150)
  Bottom Layer w10: v1(3815,3160) 3820,3155 R53.2@3820,3033.46 ; v1(3815,3680) 3820,3675 R36.2@3820,3633.46
  Bottom Layer w20: v1(2520,2895) 2594.86,2895 C31.1@2594.92,2895.06 ; v1(2560,3385) 2604.86,3385 C22.1@2634.92,3415.06 ; v1(2565,3910) 2609.86,3910 C13.1@2634.92,3935.06 ; C32.1@2625.08,2664.94 2724.94,2664.94 P26.1@2740,2680 ; C23.1@2685.08,3184.94 2784.94,3184.94 P24.1@2800,3200 ; C14.1@2705.08,3704.94 2795.06,3704.94 P22.1@2800,3700 ; v1(2950,3530) 2975.06,3504.94 C158.2@3015.08,3504.94 ; v1(3010,3965) 3010.06,3964.94 C92.2@3075.08,3964.94 ; C160.2@3084.92,2995.06 3144.94,2995.06 v1(3160,2980) ; C161.1@3085.08,2704.94 3100.14,2720 v1(3230,2720) ; C159.1@3105.08,3264.94 3125.02,3245 v1(3205,3245) ; C157.1@3165.08,3724.94 3175.02,3715 v1(3240,3715) ; v1(3335,3505) 3344.94,3495.06 C18.1@3394.92,3495.06 ; v1(3345,2995) 3384.94,2955.06 C27.1@3414.92,2955.06 ; U6.33@3658.72,3863.23 3705.08,3909.59 C9.1@3705.08,4104.94 3705.08,4164.92 v1(3705,4165) ; U8.4@4134.49,3958 4195,3958 ; C17.2@4195,3844.21 4195,3958 ; C15.2@4275.06,3975.08 4257.98,3958 4195,3958
  other v1: 2210,3820 2270,3855
  other v3: 4001,3033 4029,3033 3973,3037 3999,3055 4028,3059 3971,3074 4001,3079 4029,3087 3972,3106 3999,3110 4028,3118 3972,3138 3998,3140 4028,3144 3974,3169 4000,3169 4030,3171 3985,3592 3958,3601 3986,3621 3957,3631 3984,3650 3956,3663 3986,3680 3958,3694 3986,3711 3958,3728 3987,3745
BOOT0: BOOT1.2 U16.60 | length 522.4
  Top Layer w8: BOOT1.2@7520,2760 7605,2845 7605,2955 7651.53,3001.53 7731.53,3001.53 7781.58,3051.58 U16.60@7857.17,3051.58
CMD_BUS: R104.2 U18.AB3 | length 336.5
  Top Layer w6: U18.AB3@5613.39,3265.35 5661.18,3265.35 5661.54,3265 ; 5635,3265 5661.54,3265 ; R104.2@5846.54,3080 5668.27,3258.27 5661.54,3265
DGND: BOOT1.3 C1.1 C2.1 C3.2 C4.2 C5.2 C6.2 C7.2 C8.2 C24.2 C25.2 C33.2 C34.1 C36.1 C37.1 C38.2 C39.1 C40.1 C41.1 C42.1 C43.1 C44.1 C45.2 C46.1 C47.2 C48.2 C49.2 C50.2 C51.2 C52.2 C53.2 C54.1 C55.1 C56.1 C57.1 C58.2 C59.2 C60.1 C61.1 C62.1 C63.1 C64.1 C65.1 C66.1 C67.1 C68.1 C69.1 C70.1 C71.1 C72.1 C73.1 C74.1 C75.1 C76.1 C77.1 C78.1 C79.1 C80.1 C81.1 C82.1 C85.1 C86.1 C88.1 C90.1 C91.2 C93.1 C94.1 C95.1 C97.1 C98.1 C100.1 C101.1 C102.1 C103.1 C104.1 C106.1 C107.1 C108.1 C109.1 C111.1 C112.2 C113.2 C114.2 C116.2 C118.2 C119.2 C120.1 C121.1 C122.1 C123.1 C124.1 C125.1 C126.1 C127.1 C128.1 C129.1 C130.1 C131.1 C132.1 C133.1 C134.1 C135.2 C136.1 C137.1 C138.2 C139.2 C140.1 C141.1 C142.1 C144.1 C145.1 C147.1 C148.2 C149.1 C150.2 C151.1 C152.1 C153.1 C154.2 C155.2 C156.1 D4.2 D6.2 D7.2 D8.1 J1.2 J1.10 J2.4 JP1.4 P7.4 P8.4 P11.2 R7.2 R66.2 R68.2 R73.2 R78.1 R79.1 R80.2 R91.2 R97.2 R99.2 R100.1 R111.2 R114.2 R115.1 R118.2 R119.1 R122.2 R125.2 T11.1 T22.1 T23.1 U1.1 U1.3 U1.6 U1.7 U2.1 U2.3 U2.6 U2.7 U3.1 U4.2 U4.4 U12.2 U16.12 U16.18 U16.31 U16.47 U16.63 U17.1 U18.A1 U18.A22 U18.AA2 U18.AA22 U18.AB1 U18.AB22 U18.C5 U18.C9 U18.C11 U18.C12 U18.C14 U18.C16 U18.D3 U18.E10 U18.E18 U18.E20 U18.F3 U18.F5 U18.F12 U18.F16 U18.G2 U18.G9 U18.G11 U18.G13 U18.G15 U18.G17 U18.G20 U18.H8 U18.H10 U18.H12 U18.H13 U18.H14 U18.H16 U18.J9 U18.J15 U18.K3 U18.K7 U18.K10 U18.K11 U18.K12 U18.K13 U18.K16 U18.L8 U18.L10 U18.L11 U18.L12 U18.L13 U18.L15 U18.L20 U18.M7 U18.M10 U18.M11 U18.M12 U18.M13 U18.N3 U18.N8 U18.N10 U18.N11 U18.N12 U18.N13 U18.N15 U18.N17 U18.P6 U18.P8 U18.P16 U18.P19 U18.R7 U18.R9 U18.R11 U18.R13 U18.T8 U18.T10 U18.T12 U18.T14 U18.U3 U18.U5 U18.U7 U18.U13 U18.V6 U18.V18 U18.V20 U18.W3 U18.Y5 U18.Y9 U18.Y11 U18.Y12 U18.Y16 U18.Y18 U18.Y20 U19.2 U20.10 U21.1 U21.2 U21.3 U21.4 U21.7 U22.2 U22.7 U22.13 U22.26 U22.31 U22.33 U23.1 U23.6 U23.7 U24.1 U24.6 U24.7 U25.5 U26.5 U28.3 U28.5 | length 17171.6
  Top Layer w6: v2(4730,3185) 4731.61,3186.61 U18.A1@4786.61,3186.61 ; v2(4785,4045) 4785,4015 U18.A22@4786.61,4013.39 ; v2(4845,3325) 4846.26,3325 U18.C5@4865.35,3344.09 ; v2(4845,3480) 4845,3481.22 U18.C9@4865.35,3501.57 ; v2(4845,3680) 4846.93,3680 U18.C14@4865.35,3698.43 ; v2(4845,3755) 4865.35,3775.35 U18.C16@4865.35,3777.17 ; U18.C11@4865.35,3580.32 4864.68,3580.32 v2(4845,3600) 4845.67,3600 U18.C12@4865.35,3619.69 ; v2(4885,3245) 4885,3245.63 U18.D3@4904.72,3265.35 ; v2(4925,3520) 4925,3521.85 U18.E10@4944.09,3540.94 ; v2(4925,3835) 4925,3836.81 U18.E18@4944.09,3855.91 ; v2(4925,3955) 4925,3953.74 U18.E20@4944.09,3934.65 ; v2(4965,3245) 4983.46,3263.46 U18.F3@4983.46,3265.35 ; v2(4965,3325) 4965,3325.63 U18.F5@4983.46,3344.09 ; v2(4965,3600) 4965,3601.22 U18.F12@4983.46,3619.69 ; U18.F16@4983.46,3777.17 5002.15,3795.85 v2(5003.65,3797.35) U18.G17@5022.83,3816.54 U18.H16@5062.2,3777.17 ; v2(5002,3718) 5003.04,3718 5005.04,3720 U18.G15@5022.83,3737.8 ; v2(5005,3205) 5005,3208.15 U18.G2@5022.83,3225.98 ; v2(5005,3480) 5001.26,3480 U18.G9@5022.83,3501.57 v2(5043.13,3521.87) U18.H10@5062.2,3540.94 ; v2(5005,3560) 5005,3562.48 U18.G11@5022.83,3580.32 ; v2(5005,3640) 5022.83,3657.83 U18.G13@5022.83,3659.06 U18.H13@5062.2,3659.06 ; v2(5042,3443) 5042,3444 5060.2,3462.2 U18.H8@5062.2,3462.2 ; U18.H12@5062.2,3619.69 U18.H13@5062.2,3659.06 ; v2(5081.89,3718.11) v2@5079.39,3715.61 ; U18.J9@5101.57,3501.57 U18.K10@5140.94,3540.94 ; U18.J15@5101.57,3737.8 v2@5079.39,3715.61 ; v2(5122,3245) 5122,3246.41 U18.K3@5140.94,3265.35 ; U18.K7@5140.94,3422.83 v2@5161.06,3442.95 ; U18.K16@5140.94,3777.17 v2(5161.56,3756.55) U18.L15@5180.31,3737.8 ; v2(5163,3441) v2@5161.06,3442.95 ; U18.L8@5180.31,3462.2 v2@5161.06,3442.95 ; U18.L20@5180.31,3934.65 5180.65,3934.65 v2(5200,3954) ; U18.M7@5219.69,3422.83 v2(5238.93,3442.07) U18.N8@5259.06,3462.2 U18.P8@5298.43,3462.2 ; v2(5239,3837) 5239,3835 5240.59,3835 U18.N17@5259.06,3816.54 ; v2(5240,3284) 5240.41,3284 U18.N3@5259.06,3265.35 ; U18.N12@5259.06,3619.69 U18.N12@5257,3617.63 ; U18.N13@5259.06,3659.06 U18.N13@5257,3657 ; U18.N15@5259.06,3737.8 5259.06,3738.06 v2(5279,3758) ; v2(5279,3365) 5280,3364 5280,3365.04 U18.P6@5298.43,3383.46 ; v2(5280,3878) 5281.15,3878 U18.P19@5298.43,3895.28 ; U18.P16@5298.43,3777.17 5299.17,3777.17 v2(5319,3797) ; U18.R7@5337.8,3422.83 5339.83,3422.83 v2(5358,3441) ; U18.R9@5337.8,3501.57 5357,3520.78 v2(5357,3521) ; U18.R11@5337.8,3580.32 5355.48,3598 5357,3598 v2(5357,3599) ; U18.R13@5337.8,3659.06 5357.74,3679 v2(5358,3679) ; U18.T8@5377.17,3462.2 5396.96,3482 v2(5398,3482) ; U18.T10@5377.17,3540.94 5396,3559.78 5396,3560 v2(5397,3561) ; U18.T12@5377.17,3619.69 5377.69,3619.69 v2(5397,3639) ; U18.T14@5377.17,3698.43 5396.74,3718 v2(5397,3718) ; v2(5400,3245) 5416.54,3261.54 U18.U3@5416.54,3265.35 ; U18.U5@5416.54,3344.09 5436.63,3324 v2(5437,3324) ; U18.U7@5416.54,3422.83 5435.7,3442 v2(5436,3442) ; U18.U13@5416.54,3659.06 5417.06,3659.06 v2(5437,3679) ; U18.V18@5455.91,3855.91 5457.09,3855.91 5475,3838 v2(5475,3836) ; U18.V20@5455.91,3934.65 5475,3953.74 5475,3954 v2(5476,3954) ; U18.V6@5458.46,3383.46 U18.V6@5455.91,3383.46 5474.75,3402.31 5513.69,3402.31 v2(5514,3402) ; U18.W3@5495.28,3265.35 5514,3246.63 v2(5514,3246) ; v2(5515,3364) 5515,3362 5516.74,3362 U18.Y5@5534.65,3344.09 ; U18.Y9@5534.65,3501.57 5553,3519.93 v2(5553,3521) ; U18.Y11@5534.65,3580.32 5555,3600.67 v2(5555,3601) ; U18.Y12@5534.65,3619.69 5554,3639.04 v2(5554,3640) ; U18.Y16@5534.65,3777.17 5535.17,3777.17 v2(5554,3796) ; U18.Y18@5534.65,3855.91 5553.74,3875 5554,3875 v2(5554,3876) ; U18.Y20@5534.65,3934.65 5534.65,3935.65 v2(5555,3956) ; v2(5554,3206) v2@5555,3207 ; v2@5555.03,3207 U18.AA2@5574.02,3225.98 ; U18.AA22@5574.02,4013.39 U18.AB22@5613.39,4013.39 v2(5635,4035) ; U18.AB1@5613.39,3186.61 5613.39,3152.61 v2(5629,3137) ; U18.H13@5062.2,3659.06 U18.H14@5062.2,3698.43 v2@5079.39,3715.61 ; U18.K10@5140.94,3540.94 U18.K11@5140.94,3580.32 ; U18.K10@5140.94,3540.94 v2(5161,3561) v2(5200,3600) ; U18.K11@5140.94,3580.32 U18.K12@5140.94,3619.69 U18.L12@5180.31,3619.69 ; U18.K11@5140.94,3580.32 U18.M13@5219.69,3659.06 ; U18.L12@5180.31,3619.69 U18.M12@5219.69,3619.69 ; U18.L12@5180.31,3619.69 U18.L11@5180.31,3580.32 U18.L10@5180.31,3540.94 U18.M11@5219.69,3580.32 U18.N12@5257,3617.63 ; U18.L12@5180.31,3619.69 v2(5200,3600) ; U18.L12@5180.31,3619.69 v2(5161.11,3638.89) U18.K13@5140.94,3659.06 U18.L13@5180.31,3659.06 U18.M13@5219.69,3659.06 ; v2(5200,3600) U18.M12@5219.69,3619.69 ; v2(5200,3600) v2(5237.93,3562.07) U18.N10@5257,3543 ; U18.M12@5219.69,3619.69 U18.M10@5219.69,3540.94 U18.N10@5259.06,3540.94 U18.N10@5257,3543 ; U18.M12@5219.69,3619.69 v2(5238.97,3638.97) U18.N13@5257,3657 ; U18.M13@5219.69,3659.06 5255.94,3659.06 5257,3658 U18.N13@5257,3657 ; U18.N10@5257,3543 U18.N12@5257,3617.63 ; U18.N12@5257,3617.63 U18.N13@5257,3657
  Top Layer w8: U16.12@8146.54,2900 8146.54,2823.46 v1(8150,2820) ; U16.18@8298.11,2992.52 8362.52,2992.52 v1(8375,3005) ; U16.31@8298.11,3248.43 8351.57,3248.43 8380,3220 v1(8380,3215)
  Top Layer w10: v1(6185,3720) 6186.54,3721.54 R91.2@6186.54,3760 ; U22.26@6452.57,3728.01 6452.57,3790.63 U22.33@6503.23,3841.28 ; U22.13@6491.94,3956.35 6491.94,3852.57 U22.33@6503.23,3841.28 ; U22.31@6551,3728.01 6551,3793.51 U22.33@6519.76,3824.76 ; U22.2@6615.76,3792.97 6551.54,3792.97 U22.33@6519.76,3824.76 ; U22.7@6615.76,3891.39 6614.59,3890.22 6552.16,3890.22 U22.33@6503.23,3841.28 ; U16.63@7857.17,2992.52 7942.52,2992.52 v1(7985,3035) ; v1(7945,3255) 7949.69,3259.69 U16.47@7949.69,3340.95 ; 8146.54,2843.46 U16.12@8146.54,2900 ; U22.33@6503.23,3841.28 U22.33@6519.76,3824.76
  Top Layer w12: v3(4234,2725) 4235.06,2726.06 C126.1@4235.06,2774.92 ; C40.1@4548.5,2680 4548.5,2707.5 v2(4551,2710) ; U20.10@4717.8,2796.02 4787.52,2796.02 C42.1@4840,2848.5 ; U18.G20@5022.83,3934.65 5027.65,3934.65 v2(5044,3951) ; T11.1@8144.48,3781.03 8201.93,3723.58 D7.2@8201.93,3680.36
  Top Layer w20: C54.1@4195.06,3574.92 4195.06,3568.94 v2(4238,3526) ; v2(4318,2973) 4338.5,2973 C41.1@4340,2971.5 ; v2(4415,3041) 4416,3040 C43.1@4448.5,3040 ; v2(4558,3610) 4559,3609 4558.37,3608.37 U19.2@4558.37,3550.9 ; v2(4620,4057) 4620,4016.5 C156.1@4621.5,4015 ; C44.1@4731.5,3040 4762,3040 v2(4763,3041) ; C42.1@4840,2848.5 4840,2819 v2(4841,2818) ; R78.1@5230,2978.5 5257,2951.5 v3(5257,2951) ; C144.1@6064.94,4145.08 6114.92,4145.08 v1(6115,4145) ; v1(6155,3480) 6156,3479 C112.2@6194.01,3479 ; v1(6235,3480) 6234,3479 C112.2@6194.01,3479 ; R100.1@6340,3568.5 6339.5,3568 6273,3568 6194.01,3489.01 C112.2@6194.01,3479 ; v1(6395,4185) 6415.99,4205.99 C139.2@6439,4205.99 ; v1(6480,3140) U2.3@6560,3140 ; U1.1@6560,2630 6680,2630 ; U1.3@6560,2730 6620,2730 v1(6660,2770) ; U1.6@6560,2880 U1.7@6560,2930 6665,2930 ; U2.1@6560,3040 U24.7@6780,3040 ; U2.6@6560,3290 U2.7@6560,3340 U24.1@6780,3340 ; R97.2@6593.46,4200 6595,4200 6602,4193 v1(6623,4193) ; v1(6665,2885) 6665,2930 ; v1(6710,2695) 6680,2665 6680,2655 6680,2630 ; R99.2@6733.46,4080 6733.46,4058.54 v1(6765,4027) ; U23.6@6780,2680 U23.7@6780,2630 6680,2630 ; U23.1@6780,2930 6665,2930 ; U24.6@6780,3090 U24.7@6780,3040 ; v1(6860,3040) U24.7@6780,3040 ; v1(6980,3865) 6979,3866 C116.2@6979,3905.99 6979,3959 v1(6980,3960) ; D6.2@8040.36,4018.08 8052.28,4030 v1(8124,4030) ; R118.2@8883.46,2740 R122.2@8883.46,2840 ; R114.2@8900,3353.46 v1(8900,3395) ; C149.1@9043.5,3580 9043.5,3696.02 U26.5@9053,3705.51 ; C37.1@9125.08,3055.06 9141.06,3055.06 v1(9172,3086) ; C148.2@9248.46,3580 v1(9285,3580) ; R111.2@9320,3121.54 9378.46,3121.54 v1(9380,3120) ; R115.1@9358.5,2735 R119.1@9358.5,2835 ; v1(9361,3576) 9419.5,3576 C147.1@9433,3589.5 ; C147.1@9423.5,3580 C147.1@9433,3589.5 ; U25.5@9433,3705.51 9433,3617 ; v1(9465,3205) 9465.63,3205.63 U12.2@9530,3205.63 9497.37,3173 v1(9475,3173) ; v1(9469,3091) 9469,3076.13 C25.2@9490.08,3055.06 ; C33.2@9619.92,3464.94 9663,3508.02 v1(9663,3519) ; C150.2@9628.46,3580 9634,3580 v3(9660,3606) ; C147.1@9433,3589.5 9433,3617 ; C147.1@9433,3589.5 9433,3617
  Top Layer w30: C155.2@7259,4049 7259,4134 v1(7260,4135) ; v1(7280,3550) D8.1@7339,3550 ; U28.3@7668.14,3679 7668.14,3636.86 v1(7670,3635) ; U28.5@7802,3679 v1(7802,3585) v1@7805,3582 ; v3(8836,3742) 8834.69,3742 U3.1@8790.55,3786.14 ; v3(8836,3868) 8790.55,3822.55 U3.1@8790.55,3786.14 ; v3(8840,3789) 8837.14,3786.14 U3.1@8790.55,3786.14 ; C36.1@9120.08,3455.06 9134.06,3441.08 U17.1@9134.06,3314.8 ; P11.2@9315,4120 9287,4092 9287,3882 9310.92,3858.08 D4.2@9320.36,3858.08 ; U12.2@9530,3311.93 9530,3351 9563,3384 9613,3384 9625,3396 9619.92,3401.08 ; C33.2@9619.92,3464.94 9619.92,3401.08 ; v1(9654,3349) 9619.92,3383.08 9619.92,3401.08
  Bottom Layer w6: v2(4698,3441) 4698,3444.17 C121.1@4737.56,3483.73 ; v2(4734,3565) 4738,3561 C60.1@4817.56,3561 ; C67.1@4737.56,3341 4723,3326.44 v2(4723,3300) 4742,3281 C56.1@4797.56,3281 ; v2(4758,3720) 4759,3721 C63.1@4817.56,3721 ; v2(4760,3645) 4760,3641 C62.1@4817.56,3641 ; v2(4805,3797) 4805,3798 4808,3801 C64.1@4837.56,3801 ; C61.1@4837.56,3921 4837.56,3885.44 v2(4846,3877) v2@4847,3878 ; C68.1@4882.44,3979 4911,3979 v2(4926,3994) ; v2(4887,3157) 4887.56,3157.56 C70.1@4924.25,3157.56 ; C133.1@5021,4022.44 5049,4022.44 ; R79.1@5033.5,3915 R79.1@5048.5,3900 5048.5,3946.5 v2(5044,3951) ; v2(5049,4048) 5049,4022.44 ; v2(5065,3126) 5079,3140 C132.1@5079,3157.56 ; C107.1@5119,3657.56 5137.68,3638.89 v2(5161.11,3638.89) 5180.33,3638.89 C80.1@5199,3657.56 ; C104.1@5121,3542.44 5142.44,3542.44 v2(5161,3561) 5162.44,3562.44 C81.1@5162.44,3599 ; v2(5196,4042) 5180.56,4042 C66.1@5161,4022.44 5126,4022.44 5049,4022.44 ; C77.1@5201,3542.44 5220.63,3562.07 v2(5237.93,3562.07) 5261.37,3562.07 C111.1@5281,3542.44 ; C106.1@5201,3842.44 5233.56,3842.44 v2(5239,3837) ; C79.1@5234.56,3601 5234.56,3634.56 v2(5238.97,3638.97) 5260.42,3638.97 C95.1@5279,3657.56 ; C130.1@5239,3157.56 5239,3139 v2(5302,3076) ; v2(5280,3878) 5280,3843.44 C85.1@5281,3842.44 ; v2(5356,3837) 5366.44,3837 C101.1@5381,3822.44 ; R80.2@5373.46,3240 5390,3240 5395,3245 v2(5400,3245) ; v2(5464,3136) 5464,3135 5466.56,3137.56 C69.1@5499,3137.56 ; v2(5474,3797) 5474,3787.44 C102.1@5482.44,3779 C102.1@5498,3779 ; C142.1@5482.44,3379 5491,3379 v2(5514,3402) ; C86.1@5482.44,3719 v2(5516,3719) ; C120.1@5602.44,3279 5616,3279 v2(5643,3306)
  Bottom Layer w10: v1(7790,3310) 7791.54,3308.46 C51.2@7791.54,3030 ; v1(7945,3255) C48.2@7945,3301.54 ; v1(8045,3250) C49.2@8045,3301.54 ; v1(8160,3255) C50.2@8160,3301.54
  Bottom Layer w12: C98.1@4917.56,3461 4917.56,3479.56 v2(4924,3486) ; v2(4925,3520) 4926,3521 C90.1@4957.56,3521 ; v2(4926,3994) 4947.61,3994 C141.1@4967.58,3974.02 ; C108.1@4937.56,3681 4937.56,3704.44 v2(4926,3716) 4947.56,3737.56 C100.1@4959,3737.56 ; C97.1@5139,3357.56 5151.56,3357.56 5160,3366 v2(5160,3365) ; C97.1@5143,3355 5145.56,3357.56 C109.1@5379,3357.56 5368.44,3357.56 5357,3369 5356,3368 v2(5356,3367) ; v2(5279,3365) 5286.44,3357.56 C82.1@5299,3357.56 ; v2(5359,3954) 5389.44,3954 C145.1@5401,3942.44 ; v2(5435,3560) 5436,3561 5462.44,3561 ; C88.1@5442.44,3519 5462.44,3539 5462.44,3561 ; C72.1@5461,3922.44 5461,3939 v2(5476,3954) ; C103.1@5462.44,3599 5462.44,3561 ; v2(5515,3994) 5521,3988 C74.1@5521,3962.44 ; C129.1@5582.44,3459 5582.44,3471.44 v2(5593,3482) ; C127.1@5582.44,3559 5582.44,3586.44 v2(5594,3598) ; C73.1@5582.44,3839 5655,3839 v2(5656,3840) ; v2(5594,3640) 5602.44,3648.44 C65.1@5602.44,3679 C55.1@5602.44,3759 5645.44,3716 v3(5657,3716) ; C134.1@5622.44,3919 5636,3932.56 v2(5636,3953)
  Bottom Layer w15: v3(8446,3617) 8458.92,3629.92 C7.2@8534.94,3629.92
  Bottom Layer w20: v2(4238,3526) 4278.64,3485.36 C114.2@4334.57,3485.36 4374.92,3525.71 C78.1@4374.92,3615.06 ; C118.2@4434.57,3835.36 4434.57,3910.57 v2(4449,3925) ; v2(4612,3233) 4613.92,3234.92 C122.1@4644.94,3234.92 ; C125.1@4614.92,3975.06 4620,3980.13 v2(4620,4057) ; v2(4762,3405) 4766,3401 C57.1@4817.56,3401 ; C128.1@4915.06,2765.08 5009,2671.14 J1.10@5009,2665 ; C70.1@4924.25,3157.56 C140.1@4979,3157.56 ; v2(5400,3245) 5427.44,3217.56 C131.1@5439,3217.56 ; C135.2@5525.43,4074.64 5600.64,4074.64 v2(5602,4076) ; C124.1@5704.94,3134.92 5744.08,3134.92 v2(5746,3133) ; v2(5713,3613) 5727.13,3613 C123.1@5755.06,3585.08 ; C136.1@5735.06,4085.08 5735.06,4132.06 v2(5737,4134) ; v1(6115,4145) 6153.5,4106.5 C39.1@6170,4106.5 ; C137.1@6264.94,3754.92 6416.87,3754.92 U22.33@6503.23,3841.28 ; C2.1@6306,3268.08 6306,3291 6345,3330 6445,3330 6503.46,3330 R125.2@6573.46,3260 6610,3260 v1(6650,3300) ; C3.2@6441,3029 6452,3040 v1(6620,3040) ; C93.1@6755.06,3925.08 C94.1@6895.06,3925.08 ; v1(6940,3995) 6895.06,3950.06 C94.1@6895.06,3925.08 ; v1(6980,3960) 6945.08,3925.08 C94.1@6895.06,3925.08 ; C91.2@7085.36,3965.43 7095.79,3955 v1@7160,3955 ; v1(7765,2695) 7813.46,2646.54 C58.2@7840,2646.54 7848.46,2646.54 7872.83,2622.17 8035.63,2622.17 C59.2@8060,2646.54 ; v1(7985,3035) 7986.54,3033.46 C47.2@7986.54,3000 ; v1(8110,3200) R66.2@8146.54,3200 ; C5.2@8124,3991.92 v1(8124,4030) ; U21.4@8694.49,2658 U21.3@8694.49,2708 U21.2@8694.49,2758 U21.1@8694.49,2808 ; U4.2@8730,4005 8731,4004 C6.2@8731,3834 ; C152.1@8900,3351.5 v1(8900,3395) ; C34.1@9054,3341 9128.06,3341 v1(9134.06,3347) v1(9134.06,3422) ; C154.2@9063.46,2780 9105,2780 ; v1(9105,2710) 9105,2780 ; C153.1@9138.5,2780 9105,2780 ; C151.1@9320,3123.5 9323.5,3120 v1(9380,3120) ; C45.2@9554,3591 9624,3591 9662,3553 9662,3524 9664,3522 9663,3522 v1(9663,3519) ; C24.2@9556,3349 v1(9654,3349)
  Bottom Layer w30: v1(8210,4150) 8214,4146 C8.2@8301,4146 ; U4.2@8730,4005 8730,4094.87 C38.2@8745.08,4109.94 ; v1(8919,3590) 8920,3591 R73.2@8920,3626.54
  other v1: 6890,2705 8694.49,2730 8547,2759 8883.46,2790 9358.5,2790 6780,3065 9550,3162 9512,3163 6710,3340 9134.06,3381 9043.5,3601 7802,3610 9043.5,3627 7668.14,3665 7155,3955 9287,3999 7060,4005 7085,4005 7115,4005 9287,4034 8250,4149 8289,4149 8288,4176 8250,4177
  other v2: 5580,2985 5581,3008 5580,3030 4966,3157.56 4253,3508 7045,3530 4226.15,3537.85 7047,3556 7046,3585 5753,3844 5770,3844 4438,3915 5575,4076 5576,4099 7001,4179 6915,4180 6944,4180 6974,4182
  other v3: 4087,3041 4116,3041 4147,3044 4120,3071 4087,3072 4147,3073 4119,3103 4146,3103 4089,3104 4119,3136 4145,3136 4089,3140 4116,3171 4089,3172 4143,3173 4077,3603 4107,3605 4047,3609 4107,3635 4077,3637 4046,3643 4077,3669 4109,3669 4049,3674 4076,3702 4107,3702 4047,3706 4045,3739 4076,3739 4106,3739
DIN_1A: R17.2 U18.A18 | length 836.9
  Top Layer w8: R17.2@4093.46,4020 4209,4020 4374,3855 4690,3855 ; 4765,3855 4690,3855 ; U18.A18@4786.61,3855.91 4785.71,3855 4690,3855
DIN_2A: R34.2 U18.A9 | length 801.5
  Top Layer w8: R34.2@4093.46,3435 4191,3435 4211,3455 4213,3455 ; 4213,3457 4635.38,3457 4678.38,3500 ; 4760,3500 4678.38,3500 ; U18.A9@4786.61,3501.57 4785.04,3500 4678.38,3500
DIN_3A: R51.2 U18.B3 | length 898.4
  Top Layer w6: R51.2@4093.46,2865 4108.23,2865 4350.23,3107 4374,3107 4377,3110 4601.62,3110 4736.62,3245 4805.63,3245 U18.B3@4825.98,3265.35
DOUT_1A: R14.2 U18.A17 | length 738.1
  Top Layer w8: R14.2@4093.46,3925 4280,3925 4375,3830 4773.15,3830 U18.A17@4786.61,3816.54
DOUT_2A: R31.2 U18.B9 | length 843.5
  Top Layer w6: 4674.09,3475.91 4680.92,3482.73 4807.14,3482.73 ; 4812.96,3487.96 4807.73,3482.73 4807.14,3482.73 ; U18.B9@4825.98,3501.57 4807.14,3482.73
  Top Layer w8: R31.2@4093.46,3345 4160,3345 4193,3378 4213,3398 ; 4240,3425 4213,3398 ; 4674.09,3475.91 4628.18,3430 4245,3430 4213,3398
DOUT_3A: R48.2 U18.B2 | length 963.6
  Top Layer w6: R48.2@4093.46,2775 4162,2843.54 4162,2901.8 4355.2,3095 4605,3095 4715.46,3205.46 4805.46,3205.46 ; 4812.66,3212.66 4805.46,3205.46 ; U18.B2@4825.98,3225.98 4805.46,3205.46
FPGA_ASDO: C44.2 U18.H6 U20.15 | length 952.1
  Top Layer w6: C44.2@4666.54,3040 4664,3037.46 4664,3001 ; U20.15@4717.8,2923.98 4626.02,2923.98 4608,2942 4608,2980 4629,3001 4664,3001 ; U18.H6@5062.2,3383.46 5062.2,3377.2 5041.68,3356.68 5041.68,3131.68 5020,3110 4955,3110 4846,3001 4664,3001
FPGA_CONF_DONE: R82.2 U18.M18 | length 95.9
  Top Layer w8: U18.M18@5219.69,3855.91 5220.91,3855.91 v2(5240,3875)
  Bottom Layer w8: v2(5240,3875) 5246.54,3881.54 R82.2@5246.54,3940
FPGA_DATA0: R85.1 U18.K1 U20.8 | length 1034.7
  Top Layer w6: R85.1@4340,2768.5 R85.1@4341.93,2770.43 ; U20.8@4442.2,2770.43 4447.64,2765 4510,2765 4579,2834 v1(4579,2914) ; v1(4636,2968) 4649,2981 4851,2981 4965,3095 5065,3095 5140.94,3170.94 U18.K1@5140.94,3186.61
  Top Layer w10: R85.1@4341.93,2770.43 U20.8@4442.2,2770.43
  Bottom Layer w6: v1(4579,2914) 4582,2914 v1(4636,2968)
FPGA_DCLK: C42.2 U18.K2 U20.16 | length 654.8
  Top Layer w6: U20.16@4717.8,2949.57 4840,2949.57 ; C42.2@4840,2913.46 4840,2949.57 ; 4912.21,3010.79 4916.21,3014.79 ; 5135,3130 5140,3135 ; U18.K2@5140.94,3225.98 5140.94,3224.06 5159.79,3205.21 5159.79,3154.79 5140,3135 ; 4840,2949.57 4850.98,2949.57 4916.21,3014.79 ; 4916.21,3014.79 4984.42,3083 5088,3083 5140,3135
FPGA_LED1: D15.2 U18.AB18 | length 243.5
  Top Layer w8: U18.AB18@5613.39,3855.91 5697.84,3940.36 D15.2@5821.93,3940.36
FPGA_LED2: D14.2 U18.AB16 | length 218.1
  Top Layer w8: U18.AB16@5613.39,3777.17 5798.73,3777.17 D14.2@5821.93,3800.36
FPGA_LED3: D13.2 U18.AB13 | length 268.6
  Top Layer w8: U18.AB13@5614.69,3660.36 U18.AB13@5613.39,3659.06 5678.44,3594 5762,3594 5821.93,3653.93 D13.2@5821.93,3660.36
FPGA_LED4: D12.2 U18.AB10 | length 237
  Top Layer w8: U18.AB10@5613.97,3540.36 U18.AB10@5613.39,3540.94 5618.94,3540.94 5652,3574 5788.29,3574 D12.2@5821.93,3540.36
FPGA_LED5: D11.2 U18.A6 | length 574.6
  Top Layer w6: D11.2@4300.36,3318.08 4367.28,3385 4695,3385 ; 4755,3385 4695,3385 ; U18.A6@4786.61,3383.46 4785.08,3385 4695,3385
FPGA_LED6: D10.2 U18.A5 | length 394.4
  Top Layer w6: D10.2@4420.36,3318.08 4467.28,3365 4725,3365 4765.71,3365 U18.A5@4786.61,3344.09
FPGA_LED7: D9.2 U18.A4 | length 256.3
  Top Layer w6: D9.2@4540.36,3318.08 4545.85,3323.57 4767.77,3323.57 U18.A4@4786.61,3304.72
FPGA_LED8: D1.2 U18.AB8 | length 229
  Top Layer w8: U18.AB8@5615.59,3460 U18.AB8@5613.39,3462.2 5636.59,3439 5803.29,3439 D1.2@5821.93,3420.36
FPGA_NCE: R80.1 U18.L3 | length 140.2
  Top Layer w6: U18.L3@5180.31,3265.35 5200.67,3245 v2(5240,3245)
  Bottom Layer w6: v2(5240,3245) 5245,3240 R80.1@5310,3240
FPGA_NCONFIG: R83.1 U18.K5 | length 116
  Top Layer w8: v2(5120,3325) 5121.85,3325 U18.K5@5140.94,3344.09
  Bottom Layer w8: R83.1@5051.5,3280 5075,3280 v2(5120,3325)
FPGA_NCSO: C43.2 U18.E2 U20.7 | length 885.6
  Top Layer w6: U20.7@4442.2,2796.02 4510.02,2796.02 4542,2828 4542,2971 4563,2992 ; C43.2@4513.46,3040 4561.46,2992 4563,2992 ; 4628,3057 4641.5,3070.5 ; U18.E2@4944.09,3225.98 4925.25,3207.14 4925.25,3150.25 4882,3107 4678,3107 4641.5,3070.5 ; 4563,2992 4641.5,3070.5
FPGA_NSTATUS: R84.1 U18.K6 | length 107.7
  Top Layer w6: v2(5083,3403) 5121.41,3403 U18.K6@5140.94,3383.46
  Top Layer w8: U18.K6@5140.94,3383.46 U18.K6@5140.94,3384.06
  Bottom Layer w6: R84.1@5051.5,3380 5060,3380 v2(5083,3403)
FPGA_TCK: J1.1 R78.2 U18.L2 | length 555.7
  Top Layer w6: U18.L2@5180.31,3225.98 5200,3206.3 5200,3073.46 R78.2@5230,3043.46 5409,2864.46 J1.1@5409,2765
FPGA_TDI: J1.9 R77.1 U18.L5 | length 765.6
  Top Layer w6: 4975,2799 J1.9@5009,2765 4961,2813 4961,2992 5010.5,3041.5 R77.1@5030,3041.5 5033.5,3045 v2(5060,3045) ; v2(5160,3325) 5161.22,3325 U18.L5@5180.31,3344.09
  Bottom Layer w6: v2(5060,3045) 5160,3145 v2(5160,3325)
FPGA_TDO: J1.3 U18.L4 | length 593
  Top Layer w8: U18.L4@5180.31,3304.72 v2(5200,3285) ; v2(5220,2925) 5309,2836 J1.3@5309,2765
  Bottom Layer w8: v2(5200,3285) 5200,2945 v2(5220,2925)
FPGA_TEST1: P9.1 U18.AB20 | length 302
  Top Layer w8: U18.AB20@5613.39,3934.65 5644.65,3934.65 5660,3950 ; P9.1@5620,4160 5670,4110 5670,3960 5660,3950 ; 5650,3940 5660,3950
FPGA_TEST2: P9.2 U18.Y22 | length 152.7
  Top Layer w8: P9.2@5520,4160 5520,4045 5520,4028.03 U18.Y22@5534.65,4013.39
FPGA_TEST3: P9.3 U18.U22 | length 193
  Top Layer w8: U18.U22@5416.54,4013.39 5420,4016.85 5420,4085 ; 5420,4040 5420,4085 ; P9.3@5420,4160 5420,4085
FPGA_TEST4: P9.4 U18.R22 | length 154
  Top Layer w8: P9.4@5320,4160 5320,4055 5320,4031.18 U18.R22@5337.8,4013.39